# Altium PCB Motor Board.PcbDoc
Units mm, origin at the board's own origin, x right, y up, seen from the top; angles counter-clockwise.
Board outline 50 x 71 mm, 2 copper layers (Top Layer, Bottom Layer); 15 components, 13 nets, 58 pads, 4 vias.
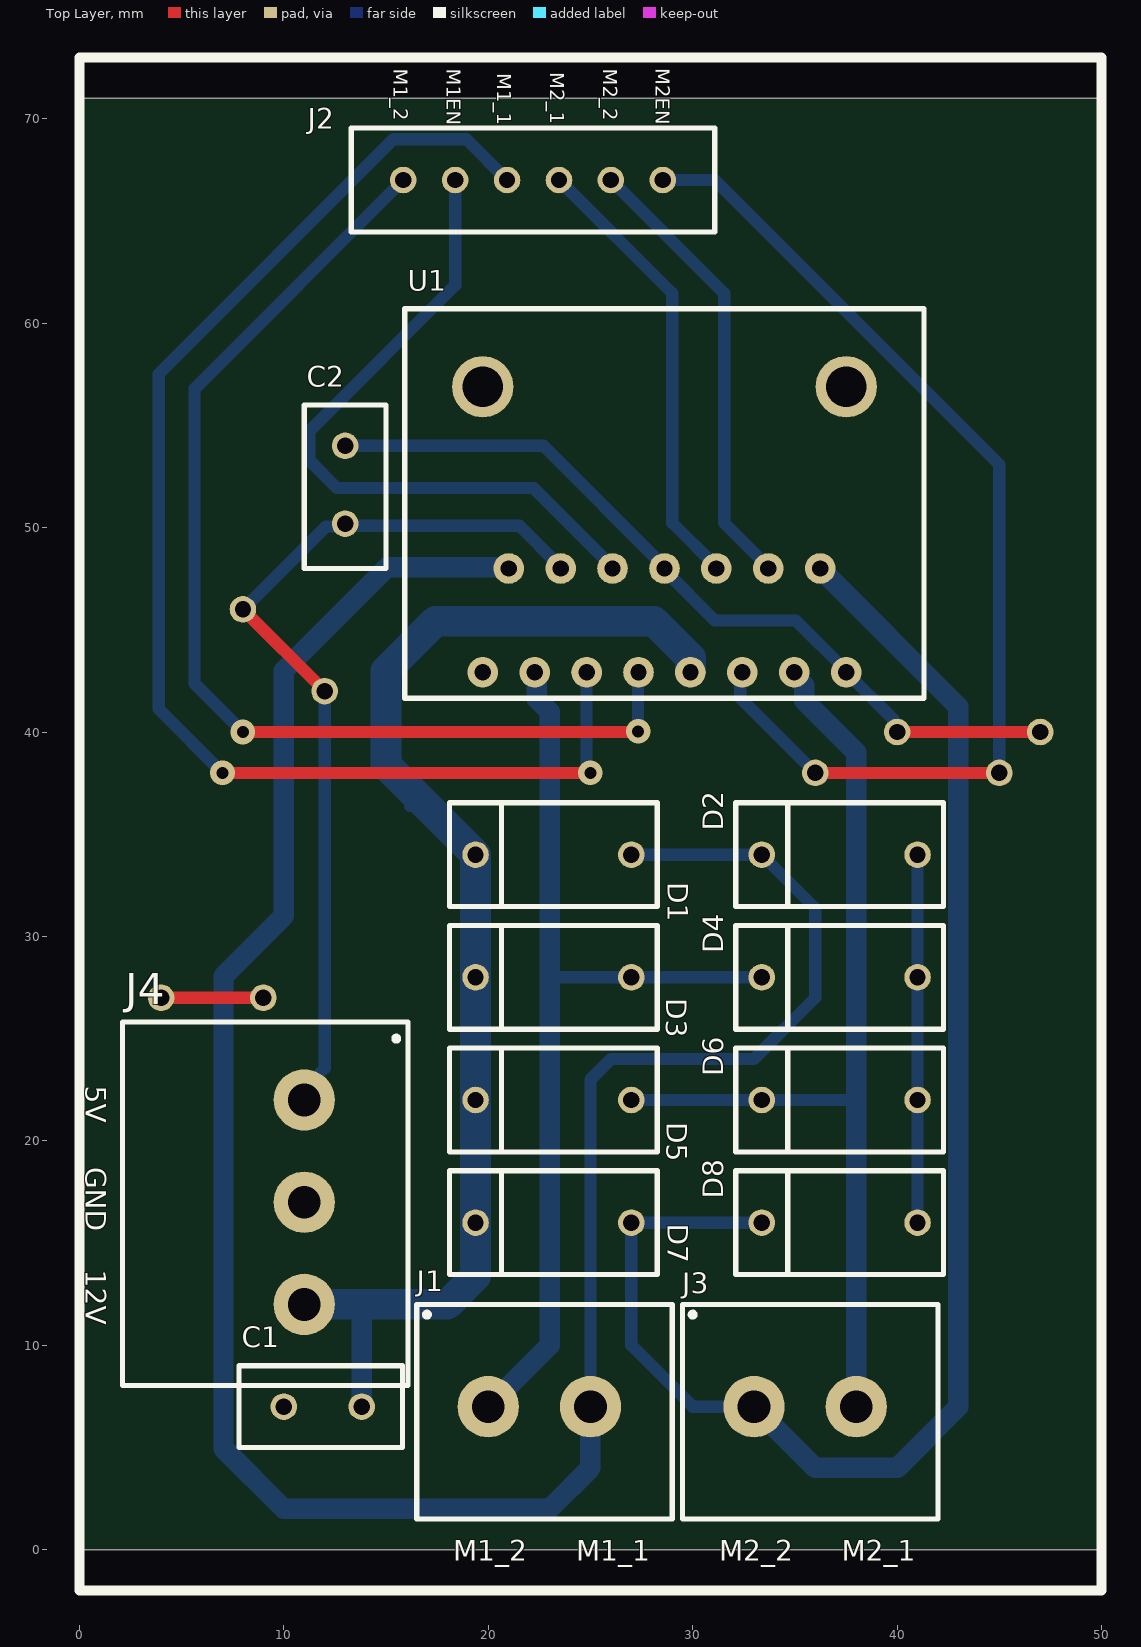
[diagram p0: Top Layer view]
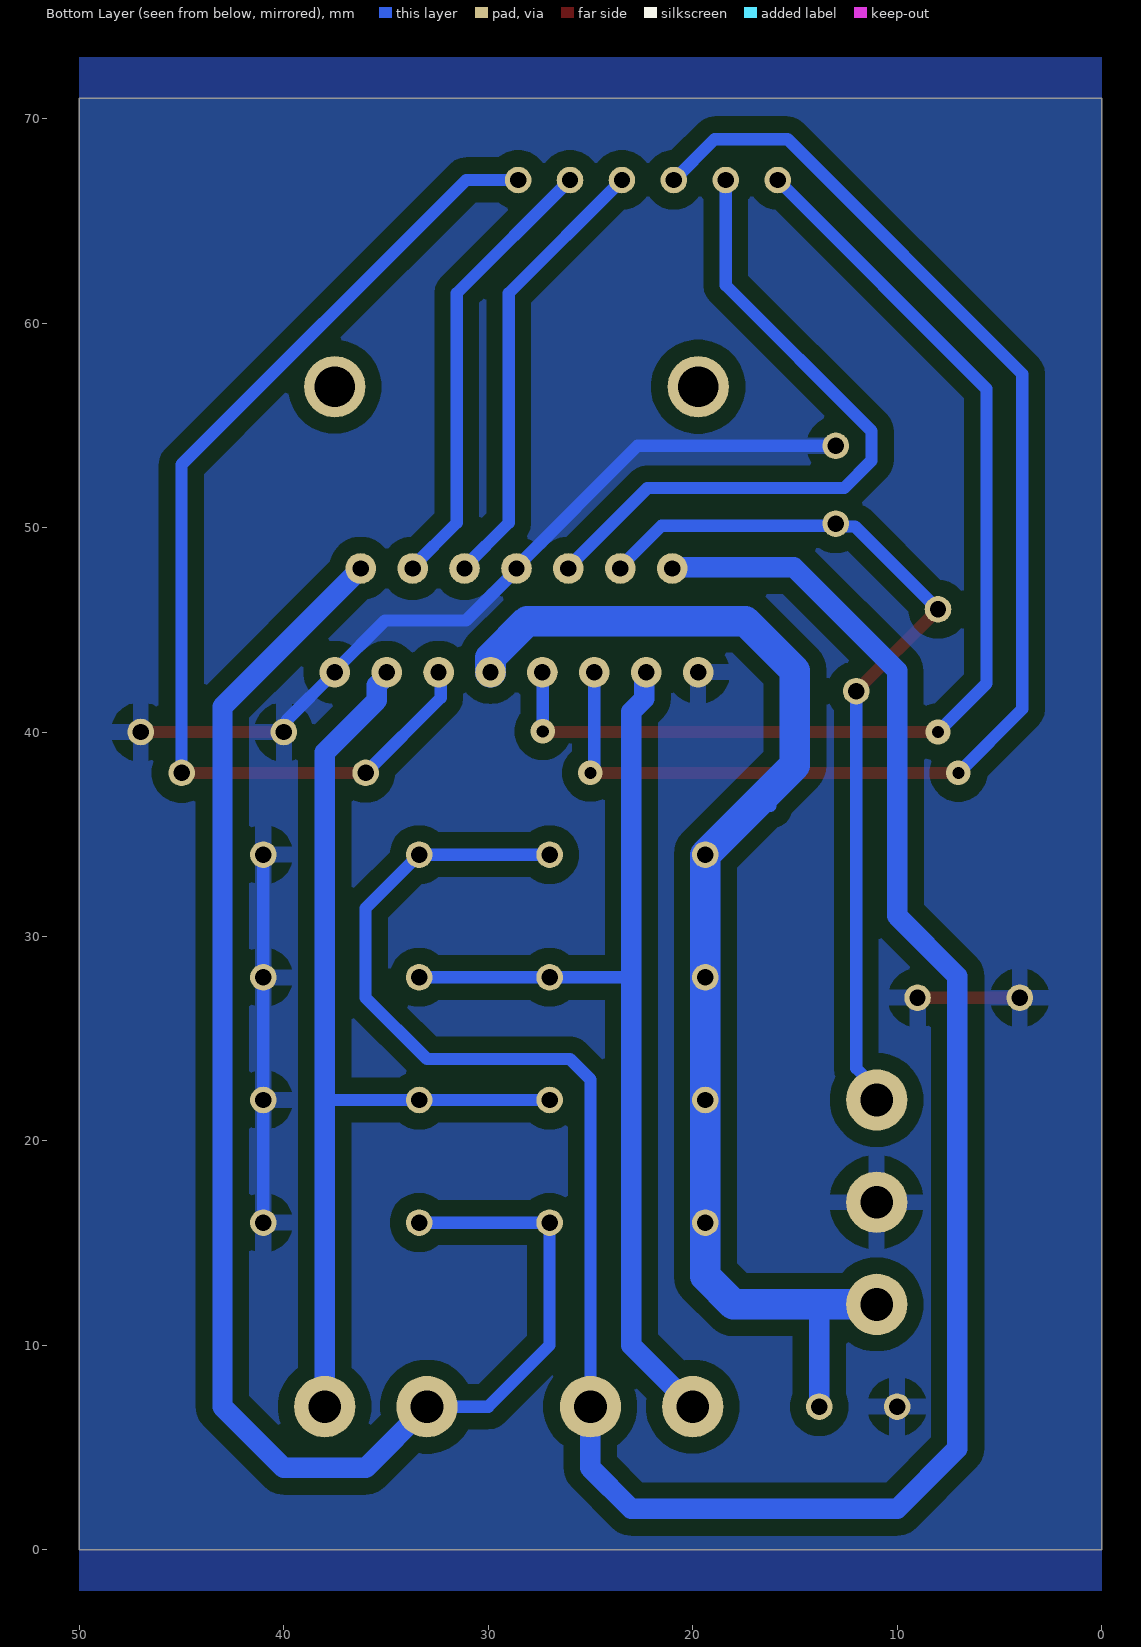
[diagram p1: Bottom Layer view, seen from below]

## Layer stack, top to bottom
Top Solder: solder mask 0.0102, Solder Resist, Dk 3.5
Top Layer: signal copper 0.0356
Dielectric 1: dielectric 0.32, FR-4, Dk 4.8
Bottom Layer: signal copper 0.0356
Bottom Solder: solder mask 0.0102, Solder Resist, Dk 3.5

## Board outline
0,71 50,71 50,0 0,0

## Design rules (kind name [scope] priority, off if disabled: settings)
Clearance [All] p1: gap=0.8 ignorepadtopadclearanceinfootprint=FALSE
Height [All] p1: minheight=0 maxheight=50 prefheight=12.7
PlaneClearance [All] p1: clearance=0.8
PlaneConnect [All] p1: planeconnectstyle=Relief reliefexpansion=0.8 reliefentries=4 reliefconductorwidth=0.8 reliefairgap=0.8
PolygonConnect [All] p1: connectstyle=Relief reliefconductorwidth=0.8 reliefentries=4 polygonreliefangle="90 Angle" airgapwidth=0.8
RoutingVias [All] p1: holewidth=0.711 width=1.27 viastyle="Through Hole" minholewidth=0.711 minwidth=1.27 maxholewidth=0.711 maxwidth=1.27
SolderMaskExpansion [All] p1: expansion=0.102 istentingtop=FALSE
Width [All] p1: maxlimit=1.5 minlimit=0.6 preferedwidth=0.8 minimp=50.000000 maximp=50.000000 favimp=50.000000
27 further rules are at their usual default settings.

## Components (designator, comment, footprint, x,y, rotation, side; value= is the part's Value field where it differs from the comment)
C1 "Ceramic Capacitor" "Ceramic Cap" 13.81,7 r180 top value=100nF
C2 "Ceramic Capacitor" "Ceramic Cap" 13,54 r270 top value=100nF
D1 "Diode" 2A07 27,34 r180 top
D2 "Diode" 2A07 41,34 r180 top
D3 "Diode" 2A07 27,28 r180 top
D4 "Diode" 2A07 41,28 r180 top
D5 "Diode" 2A07 27,22 r180 top
D6 "Diode" 2A07 41,22 r180 top
D7 "Diode" 2A07 27,16 r180 top
D8 "Diode" 2A07 41,16 r180 top
J1 "Motor 1" "Terminal Block 2-pins" 20,7 r0 top
J2 "Headers-6" "Headers 6-pins" 15.84,67 r0 top
J3 "Motor 2" "Terminal Block 2-pins" 33,7 r0 top
J4 "Terminal Block 3" "Terminal Block 3" 11,22 r270 top
U1 "L298N" L298N 19.73,42.92 r0 top

## Footprints (in the part's own frame and the unit in brackets; to place one, negate y for a bottom-side part, rotate by r counter-clockwise, add the part's x,y. Pads: shape width x height; smd on the part's side, far side on the other; paste and mask are expansions set on the pad)
2A07 [mm]
  round 1.3 hole 0.8: 1(0,0) 2(7.62,0)
  silkscreen extent -1.27,-2.54 8.89,2.54, body extent -0.26,-1.27 7.88,1.26, height 2.47
"Ceramic Cap" [mm]
  round 1.3 hole 0.8: 1(0,0) 2(3.81,0)
  silkscreen extent -2,-2 6,2, body extent -0.83,-1.21 4.83,1.25, height 4
"Headers 6-pins" [mm]
  round 1.3 hole 0.8: 1(0,0) 2(2.54,0) 3(5.08,0) 4(7.62,0) 5(10.16,0) 6(12.7,0)
  silkscreen extent -2.54,-2.54 15.24,2.54, body extent -1.27,-1.27 13.97,1.27, height 8.47
L298N [mm]
  round 1.5 hole 0.8: 1(0,0) 2(1.27,5.08) 3(2.54,0) 4(3.81,5.08) 5(5.08,0) 6(6.35,5.08) 7(7.62,0) 8(8.89,5.08) 9(10.16,0) 10(11.43,5.08) 11(12.7,0) 12(13.97,5.08) 13(15.24,0) 14(16.51,5.08) 15(17.78,0)
  round 3 hole 2: S1(0,13.97) S2(17.78,13.97)
  silkscreen extent -3.81,-1.27 21.59,17.78, body extent -2.63,-0.28 20.37,16.74, height 25.7
"Terminal Block 2-pins" [mm] "Throwhole"
  round 3 hole 1.6: 1(0,0) 2(5,0)
  silkscreen extent -3.5,-5.5 9,5, body extent -2.44,-4.96 7.96,4.04, height 11.7
"Terminal Block 3" [mm]
  round 3 hole 1.6: 1(0,0) 2(5,0) 3(10,0)
  silkscreen extent -3.81,-8.89 13.97,5.08, body extent -2.54,-8.29 12.7,3.81, height 8.67

## Part data
J1 J3: library part "Terminal Block 2-pins", MF="Phoenix Contact", PN=1935161, Supplier=Digikey, Supplier PN=277-1667-ND
D1 D2 D3 D4 D5 D6 D7 D8: ComponentLink1Description="New link", ComponentLink1URL=https://electra.store/product/2a07-700v-2a-diode/, MF PN=2A07, Supplier=Electra, Supplier PN=2A07
U1: ComponentLink1Description=Link, ComponentLink1URL=https://electra.store/product/l298-dip-dual-full-bridge-driver/, PN=L298N, Supplier=Electra

## Free pads (board coordinates)
  round 1.3 hole 0.8: 6(36,38) 7(45,38) 8(9,27) 9(4,27) 12(40,40) 13(47,40) 14(12,42) 15(8,46)

## Via types
v1: diameter 1.2, hole 0.6, Top Layer to Bottom Layer, 4 vias

## Nets (pads, with @x,y where several pads share a name; then routed paths per layer and width w, separated by ;. In a path a pad name is that pad's centre, name@x,y a point inside that pad or via, vN(x,y) a via of type N, cw(c..) or ccw(c..) an arc to the next point about the centre after c; other vN are vias at no path point)
+5V0: C2.2 J4.1 pad.14 pad.15 U1.4 | length 44.5
  Top Layer w0.6: pad.15 pad.14 ; C2.2@12.866,50.056 C2.2
  Bottom Layer w0.6: pad.15 12.056,50.056 12.866,50.056 C2.2 13.1,50.09 21.526,50.09 23.54,48.076 U1.4 ; J4.1 11,22.551 12,23.551 pad.14
+12V0: C1.1 D1.2 D3.2 D5.2 D7.2 J4.3 U1.9 | length 63.8
  Bottom Layer w0.6: C1.1 C1.1@13.865,6.945 ; 16.19,36.38 16.19,37.19
  Bottom Layer w1: C1.1 13.81,11.81 14,12 ; U1.9 U1.9@29.986,43.016
  Bottom Layer w1.5: J4.3 14,12 18,12 19.38,13.38 D7.2 D5.2 D3.2 D1.2 16.19,37.19 15,38.38 15,43 17.425,45.425 28.098,45.425 29.89,43.633 U1.9
GND: C1.2 C2.1 D2.1 D4.1 D6.1 D8.1 J4.2 pad.8 pad.9 pad.12 pad.13 U1.1 U1.8 U1.15 | length 63.3
  Top Layer w0.6: pad.9 pad.8 ; pad.12 pad.13
  Bottom Layer w0.6: C2.1 22.696,54 28.62,48.076 U1.8 28.62,47.924 31.084,45.46 35.046,45.46 37.51,42.996 U1.15 39.866,40.564 39.866,40.134 pad.12 ; U1.1 U1.1@19.73,42.996 ; D8.1 D6.1 D4.1 D2.1
Motor1_1: J2.3 U1.5 | length 66.4
  Top Layer w0.6: v1(7,38) v1(25,38)
  Bottom Layer w0.6: v1(7,38) 3.88,41.12 3.88,57.515 15.365,69 18.92,69 J2.3 ; U1.5 24.81,38.379 25,38.189 v1(25,38)
Motor1_2: J2.1 U1.7 | length 54.5
  Top Layer w0.6: v1(8,40) 27.308,40.008 v1@27.341,40.008
  Bottom Layer w0.6: v1(8,40) 5.625,42.375 5.625,56.785 J2.1 ; v1@27.308,40.008 v1(27.329,40.029) 27.329,42.899 U1.7
Motor1_EN: J2.2 U1.6 | length 33.7
  Bottom Layer w0.6: J2.2 18.38,61.855 11.25,54.725 11.25,53.275 12.585,51.94 22.216,51.94 26.08,48.076 U1.6
Motor1_O1: D1.1 D2.2 J1.2 U1.2 | length 118.5
  Bottom Layer w0.6: J1.2 25,23 26,24 33,24 36,27 36,31.38 D2.2 D1.1
  Bottom Layer w1: U1.2 20.95,48.05 15.05,48.05 10,43 10,31 7.05,28.05 7.05,4.95 10,2 23,2 25,4 J1.2
Motor1_O2: D3.1 D4.2 J1.1 U1.3 | length 47.8
  Bottom Layer w0.6: 23,28 D3.1 D4.2
  Bottom Layer w1: J1.1 23,10 23,28 23,41 22.366,41.634 22.366,42.824 U1.3
Motor2_1: J2.4 U1.10 | length 22.2
  Bottom Layer w0.6: J2.4 29,61.46 29,50.236 31.16,48.076 U1.10
Motor2_2: J2.5 U1.12 | length 22.2
  Bottom Layer w0.6: J2.5 31.54,61.46 31.54,50.236 33.7,48.076 U1.12
Motor2_EN: J2.6 pad.6 pad.7 U1.11 | length 52.8
  Top Layer w0.6: pad.6 pad.7
  Bottom Layer w0.6: J2.6 31.08,67 45,53.08 pad.7 ; U1.11 32.322,42.812 32.322,41.678 pad.6
Motor2_O1: D5.1 D6.2 J3.2 U1.13 | length 48.2
  Bottom Layer w0.6: D5.1 D6.2 38,22
  Bottom Layer w1: U1.13 34.97,42.785 35.46,42.295 35.46,41.54 38,39 38,22 J3.2
Motor2_O2: D7.1 D8.2 J3.1 U1.14 | length 76.1
  Bottom Layer w0.6: J3.1 30,7 27,10 D7.1 D8.2 D8.2@33.38,15.811
  Bottom Layer w1: J3.1 36,4 40,4 43,7 43,41.24 U1.14
pads on no net: U1.S1 U1.S2

## Polygon pours and split planes (outlines as drawn)
GND on Bottom Layer "NONET_L01_P-001" (solid, pour order 0): 50,73 0,73 0,-2 50,-2

## Silkscreen, mask and mechanical layers (free items; w line width, h text height)
Top Overlay:
  lines w0.5: 0,-2 50,-2 50,73 0,73 0,-2
  text "M2EN" at 28.203,72.467 h0.7 r270
  text "M1_2" at 15.376,72.443 h0.7 r270
  text "M1EN" at 17.964,72.443 h0.7 r270
  text "M2_2" at 25.614,72.443 h0.7 r270
  text "M2_1" at 23.025,72.279 h0.7 r270
  text "M1_1" at 20.437,72.232 h0.7 r270
  text "5V" at 0.3,22.7 h1 r270
  text "GND" at 0.3,18.7 h1 r270
  text "12V" at 0.3,13.7 h1 r270
  text "M1_2" at 18.3,-0.533 h1
  text "M1_1" at 24.3,-0.533 h1
  text "M2_2" at 31.3,-0.533 h1
  text "M2_1" at 37.3,-0.533 h1